# Altium PCB Cube_Sensor.PcbDoc
Units mm, origin at the board's own origin, x right, y up, seen from the top; angles counter-clockwise.
Board outline 21.88 x 22 mm, 2 copper layers (Top Layer, Bottom Layer), stack 1.071 mm thick; 17 components, 11 nets, 35 pads, 107 vias.
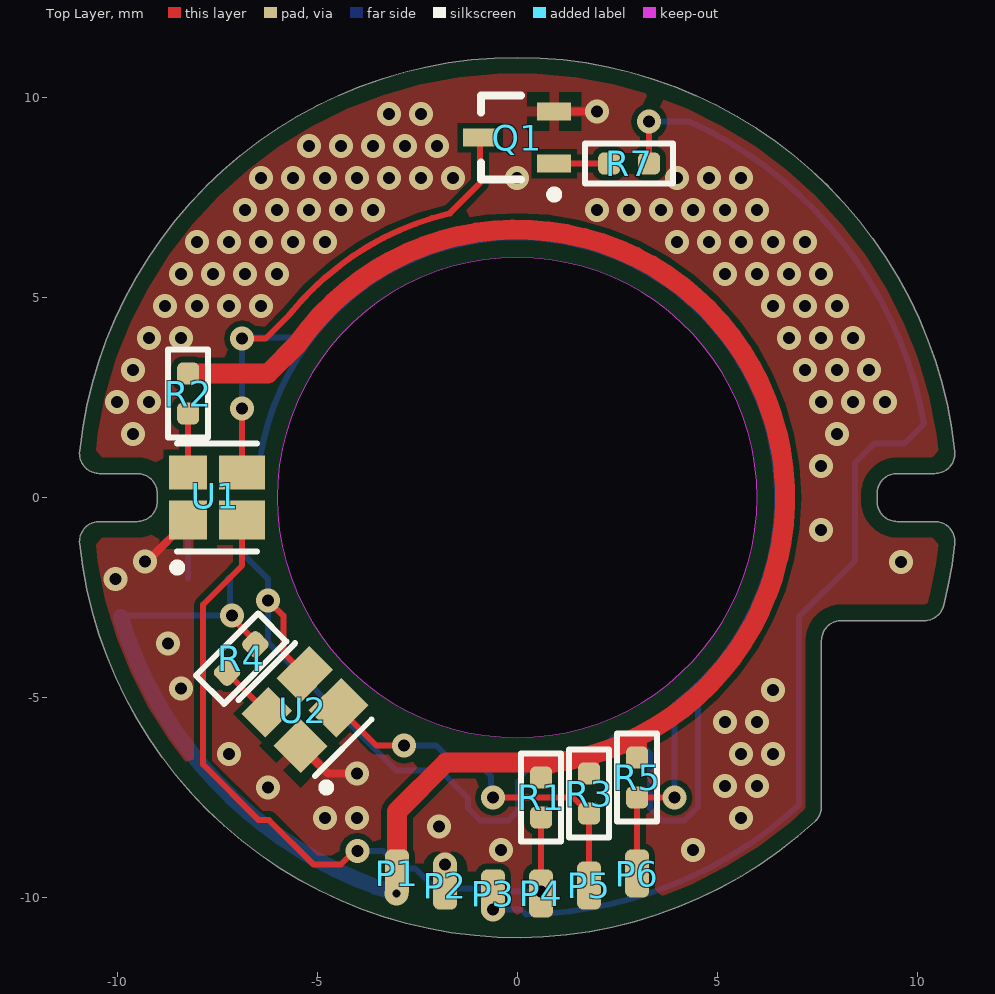
[diagram p0: Top Layer view]
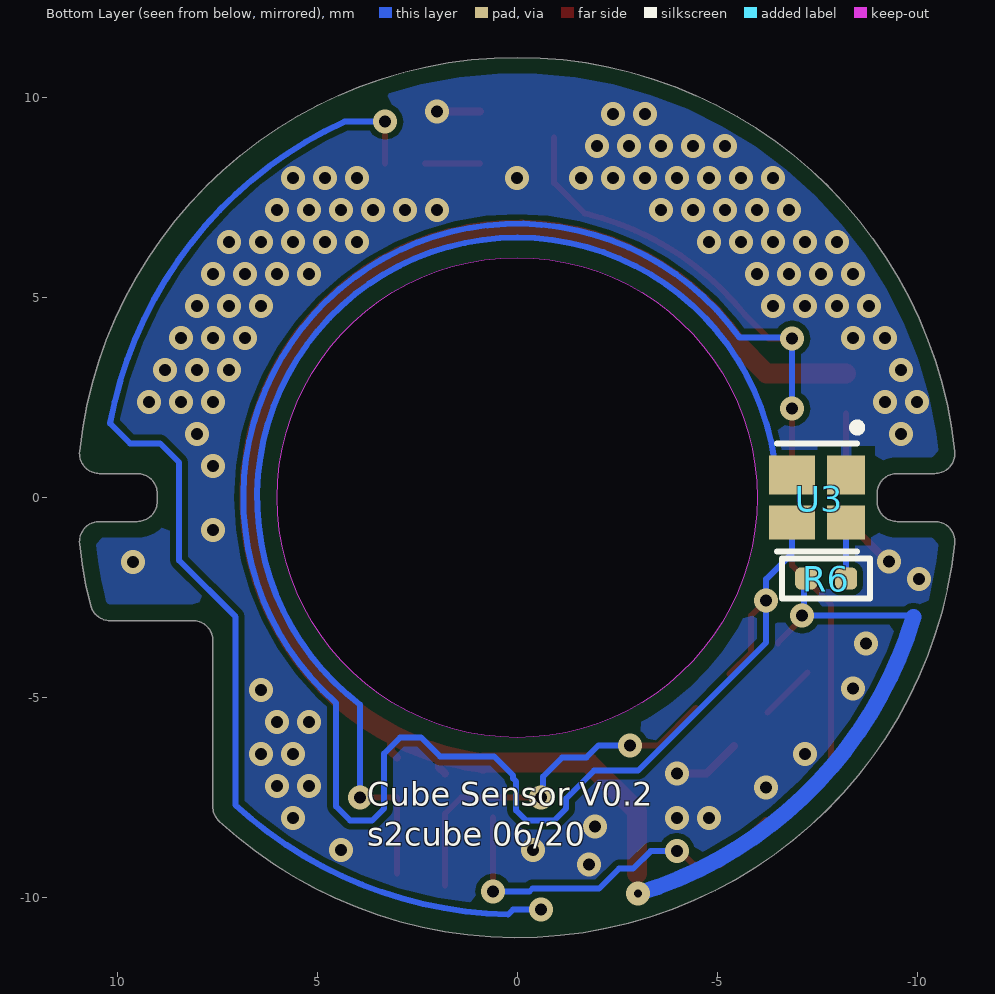
[diagram p1: Bottom Layer view, seen from below]
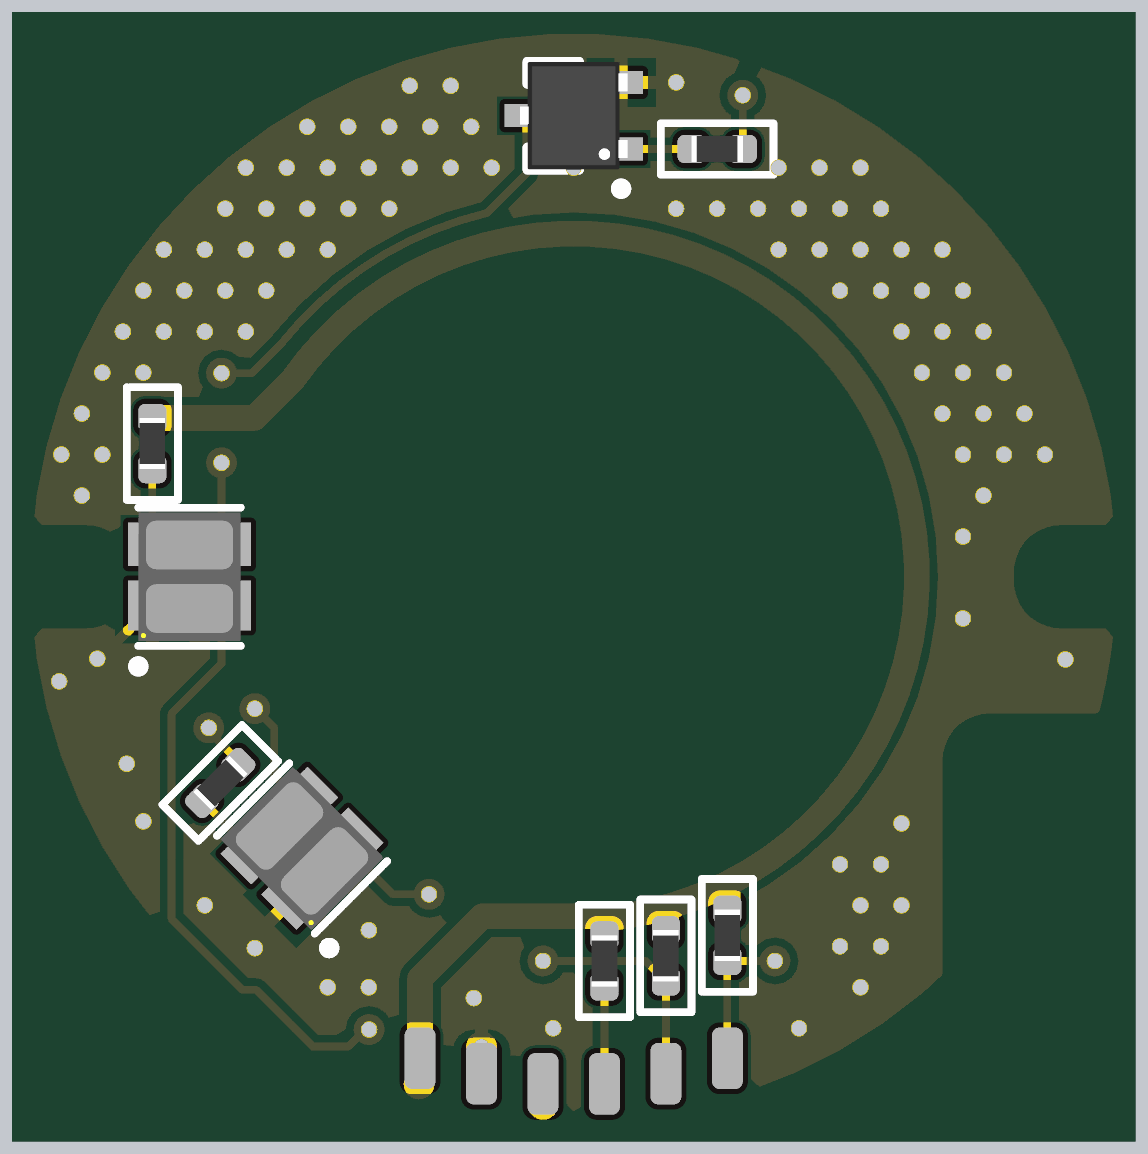
[diagram p2: 3D render of the assembled board from above, using the file's embedded part models]

## Layer stack, top to bottom
Top Solder: solder mask 0.0102, Solder Resist, Dk 3.5
Top Layer: signal copper 0.0356
Dielectric 1: dielectric 1, FR-4, Dk 4.8
Bottom Layer: signal copper 0.0356
Bottom Solder: solder mask 0.0102, Solder Resist, Dk 3.5

## Board outline
-10.939,-1.152 cw(c-10.442,-1.1) -10.442,-0.6 -9.5,-0.6 ccw(c-9.5,-0.1) -9,-0.1 -9,0.1 ccw(c-9.5,0.1) -9.5,0.6 -10.442,0.6 cw(c-10.442,1.1) -10.939,1.152 cw(c0,0) 10.939,1.152 cw(c10.442,1.1) 10.442,0.6 9.5,0.6 ccw(c9.5,0.1) 9,0.1 9,-0.1 ccw(c9.5,-0.1) 9.5,-0.6 10.442,-0.6 cw(c10.442,-1.1) 10.939,-1.152 cw(c0,0) 10.663,-2.7 cw(c10.179,-2.577) 10.179,-3.077 8.108,-3.077 ccw(c8.108,-3.577) 7.608,-3.577 7.608,-7.728 cw(c7.108,-7.728) 7.446,-8.096 cw(c0,0)
cut-out: -6,0 ccw(c0,0) 0,-6 ccw(c0,0) 6,0 ccw(c0,0) 0,6 ccw(c0,0)

## Design rules (kind name [scope] priority, off if disabled: settings)
BoardOutlineClearance [All] p1: gap=0.4 ignorepadtopadclearanceinfootprint=FALSE
Clearance [All] p1: gap=0.15 ignorepadtopadclearanceinfootprint=FALSE
PolygonConnect [All] p1: connectstyle=Relief reliefconductorwidth=0.254 reliefentries=4 polygonreliefangle="90 Angle" airgapwidth=0.254
RoutingVias [All] p1: holewidth=0.3 width=0.6 viastyle="Through Hole" minholewidth=0.3 minwidth=0.55 maxholewidth=1 maxwidth=6
SolderMaskExpansion [All] p1: expansion=0.102 istentingtop=FALSE
Width [All] p1: maxlimit=10 minlimit=0.15 preferedwidth=0.15
30 further rules are at their usual default settings.

## Components (designator, comment, footprint, x,y, rotation, side; value= is the part's Value field where it differs from the comment)
P1 "PAD_4" PAD_B2B -3,-9.4 r90 top
P2 "PAD_4" PAD_B2B -1.8,-9.7 r270 top
P3 "PAD_4" PAD_B2B -0.6,-9.9 r90 top
P4 "PAD_4" PAD_B2B 0.6,-9.9 r90 top
P5 "PAD_4" PAD_B2B 1.8,-9.7 r90 top
P6 "PAD_4" PAD_B2B 3,-9.4 r90 top
Q1 "SSM3K36TU" SSM3K36TU 0,9 r180 top
R1 "330R" RESC0402X04N 0.6,-7.5 r90 top
R2 "330R" RESC0402X04N -8.225,2.6 r90 top
R3 "330R" RESC0402X04N 1.8,-7.4 r90 top
R4 "330R" RESC0402X04N -6.9,-4.025 r45 top
R5 "330R" RESC0402X04N 3,-7 r90 top
R6 "330R" RESC0402X04N -7.725,-2.025 r0 bottom
R7 "330R" RESC0402X04N 2.8,8.35 r0 top
U1 "VCNT2020" VCNT2020 -7.5,0 r90 top locked
U2 "VCNT2020" VCNT2020 -5.303,-5.303 r135 top locked
U3 "VCNT2020" VCNT2020 -7.5,0 r270 bottom locked

## Footprints (in the part's own frame and the unit in brackets; to place one, negate y for a bottom-side part, rotate by r counter-clockwise, add the part's x,y. Pads: shape width x height; smd on the part's side, far side on the other; paste and mask are expansions set on the pad)
PAD_B2B [mm]
  rrect50% 1.2x0.6 smd: 1(0,0)
RESC0402X04N [mm] "Chip Resistor, 2-Leads, Body 1.00x0.50mm, IPC Medium Density"
  rrect50% 0.55x0.55 smd: 1(-0.5,0) 2(0.5,0)
  silkscreen extent -1.1,-0.5 1.1,0.5, body extent -0.5,-0.25 0.5,0.25, height 0.35
SSM3K36TU [mm] "SOTFL, 3-Leads, Body 2.00x2.10mm, Pitch 0.65mm, IPC Medium Density"
  rect 0.85x0.45 smd: 1(-0.925,0.65) 2(-0.925,-0.65) 3(0.925,0)
  silkscreen extent -1.02,-1.05 0.9,1.52, body extent -1.05,-1.05 1.05,1.05, height 0.75
VCNT2020 [mm] "4-SMD"
  rect 0.97x0.95 smd: 1(-0.56,0.725)
  rect 0.97x1.15 smd: 2(-0.56,-0.625)
  rect 0.85x0.95 smd: 3(0.63,0.725)
  rect 0.85x1.15 smd: 4(0.63,-0.625)
  silkscreen extent -1.85,-1 1.35,1.1, body extent -1.25,-1 1.25,1, height 0.81

## Part data
P1 P2 P3 P4 P5 P6: "a Pad for board to board connection"
Q1: "N-Channel 20V 500mA (Ta) 800mW (Ta) Surface Mount UFM", Case=UFM, Manufacturer="Toshiba Semiconductor and Storage", Supplier Part Number 1=Digi-Key, Categories=Transistors, Manufacturer Part Number=SSM3K36TU, Supplier 1=SSM3K36TULFCT-ND
R1 R2 R3 R4 R5 R6 R7: library part "RES 330R", "RES SMD 330R OHM 1% 1/16W 0402", Manufacturer=YAGEO, Manufacturer Part Number=RC0402FR-07330RL, Package / Case=0402, Supplier Part Number 1=C105875, Category=Resistors, Resistance=330R, Supplier 1=LCSC
U1 U2 U3: "REFLECTIVE SENSOR WITH PTR OUTPU", Case="4-SMD Module", Manufacturer="Vishay Semiconductor Opto Division", Supplier Part Number 1=VCNT2020CT-ND, Categories="Optical Sensors", Manufacturer Part Number=VCNT2020, Supplier 1=Digi-Key

## Via types
v1: diameter 0.6, hole 0.3, Top Layer to Bottom Layer, tented both sides, 106 vias
v2: diameter 0.6, hole 0.2, Top Layer to Bottom Layer, tented both sides, 1 vias

## Nets (pads, with @x,y where several pads share a name; then routed paths per layer and width w, separated by ;. In a path a pad name is that pad's centre, name@x,y a point inside that pad or via, vN(x,y) a via of type N, cw(c..) or ccw(c..) an arc to the next point about the centre after c; other vN are vias at no path point)
CTRL: P3.1 R7.2 | length 31.7
  Top Layer w0.15: R7.2 v1(3.3,9.399)
  Bottom Layer w0.15: v1(-0.6,-10.3) 0.101,-10.3 0.226,-10.424 ccw(c0,0) 7.04,-7.691 7.04,-2.985 8.45,-1.575 8.45,0.875 8.925,1.35 9.675,1.35 10.175,1.85 ccw(c0,0) 4.313,9.399 v1(3.3,9.399)
GND: P2.1 Q1.2 U1.1 U2.1 U3.1 | length 4.3
  Top Layer w0.2: v1(-9.3,-1.6) -9.255,-1.6 -8.225,-0.57 U1.1 ; U2.1 -4.732,-6.9 v1(-4,-6.9) ; Q1.2 v1(2,9.65)
  other v1: -1.8,-9.175 -0.401,-8.815 4.399,-8.815 -1.95,-8.225 -4.801,-8.015 -4.001,-8.015 5.599,-8.015 -6.225,-7.25 5.199,-7.215 5.999,-7.215 -7.201,-6.415 5.599,-6.415 6.399,-6.415 5.199,-5.615 5.999,-5.615 6.399,-4.815 -8.4,-4.775 -8.725,-3.65 -10.045,-2.042 9.599,-1.615 7.599,-0.815 7.599,0.785 -9.601,1.585 7.999,1.585 -10.001,2.385 -9.201,2.385 7.599,2.385 8.399,2.385 9.199,2.385 -9.601,3.185 7.199,3.185 7.999,3.185 8.799,3.185 -9.201,3.985 -8.401,3.985 6.799,3.985 7.599,3.985 8.399,3.985 -8.801,4.785 -8.001,4.785 -7.201,4.785 -6.401,4.785 6.399,4.785 7.199,4.785 7.999,4.785 -8.401,5.585 -7.601,5.585 -6.801,5.585 -6.001,5.585 5.199,5.585 5.999,5.585 6.799,5.585 7.599,5.585 -8.001,6.385 -7.201,6.385 -6.401,6.385 -5.601,6.385 -4.801,6.385 3.999,6.385 4.799,6.385 5.599,6.385 6.399,6.385 7.199,6.385 -6.801,7.185 -6.001,7.185 -5.201,7.185 -4.401,7.185 -3.601,7.185 1.999,7.185 2.799,7.185 3.599,7.185 4.399,7.185 5.199,7.185 5.999,7.185 -6.401,7.985 -5.601,7.985 -4.801,7.985 -4.001,7.985 -3.201,7.985 -2.401,7.985 -1.601,7.985 -0.001,7.985 3.999,7.985 4.799,7.985 5.599,7.985 -5.201,8.785 -4.401,8.785 -3.601,8.785 -2.801,8.785 -2.001,8.785 -3.201,9.585 -2.401,9.585
IRED1: R2.1 U1.3 | length 1.5
  Top Layer w0.15: U1.3 R2.1
IRED2: R4.1 U2.3 | length 1.4
  Top Layer w0.15: R4.1 U2.3
IRED3: R6.1 U3.3 | length 1.4
  Bottom Layer w0.15: R6.1 U3.3
IRED_GND: Q1.3 U1.4 U2.4 U3.4 | length 60.1
  Top Layer w0.15: U1.4 v1(-6.875,2.225) ; v1(-6.875,3.975) -6.288,3.975 -5.69,4.573 cw(c0,0) -1.706,7.098 ; v1(-6.225,-2.575) -5.847,-2.953 -5.847,-3.876 U2.4 ; -1.684,7.106 -0.925,7.865 Q1.3
  Bottom Layer w0.15: U3.4 -6.875,-1.392 -6.225,-2.042 v1(-6.225,-2.575) -6.225,-3.625 -3.025,-6.825 -1.925,-6.825 -1.225,-7.525 -1.225,-7.775 -0.925,-8.075 -0.225,-8.075 0.025,-7.825 0.025,-7.1 0.1,-7.025 0.1,-6.95 0.575,-6.475 1.925,-6.475 2.4,-6 2.925,-6 3.325,-6.4 3.325,-7.775 3.625,-8.075 4.175,-8.075 4.525,-7.725 4.525,-5.139 4.533,-5.131 ccw(c0,0) -5.559,3.996 -6.854,3.996 v1(-6.875,3.975) v1(-6.875,2.225)
MAIN_CTRL_G: Q1.1 R7.1 | length 1.4
  Top Layer w0.15: Q1.1 R7.1
S1: P4.1 R1.1 U1.2 | length 18.5
  Top Layer w0.15: U1.2 -6.875,-1.7 -7.175,-2 -7.85,-2.675 -7.85,-6.675 -6.461,-8.064 -6.203,-8.064 -5.096,-9.171 -4.405,-9.171 -4.073,-8.839 v1(-3.995,-8.839) ; P4.1 v1(0.6,-9.85) R1.1
  Bottom Layer w0.15: v1(-3.995,-8.839) -3.336,-8.839 -2.9,-9.275 -2.55,-9.275 -2.05,-9.775 -0.383,-9.775 -0.308,-9.85 v1(0.6,-9.85)
S2: P5.1 R3.1 U2.2 | length 9.4
  Top Layer w0.15: U2.2 -3.523,-6.2 v1(-2.825,-6.2) ; v1(-0.6,-7.5) 1.4,-7.5 R3.1 P5.1
  Bottom Layer w0.15: v1(-2.825,-6.2) -2.027,-6.2 -1.727,-6.5 -1.125,-6.5 -0.65,-6.975 -0.65,-7.45 v1(-0.6,-7.5)
S3: P6.1 R5.1 U3.2 | length 31
  Top Layer w0.15: P6.1 R5.1 v1(3.928,-7.5)
  Bottom Layer w0.15: U3.2@-6.475,0.564 cw(c0,0) 3.928,-5.179 v1(3.928,-7.5)
VDD_3V3: P1.1 R1.2 R2.2 R3.2 R4.2 R5.2 R6.2 | length 51.6
  Top Layer w0.15: v1(-7.125,-2.95) -7.125,-3.021 -6.525,-3.621 R4.2@-6.525,-3.65
  Top Layer w0.2: R3.2 1.952,-6.748 1.952,-6.448 2,-6.4 ; R5.2 3.152,-6.348 3.152,-6.048 3.2,-6
  Top Layer w0.5: R2.2 -6.231,3.1 -5.488,3.843 cw(c0,0) 0.85,-6.646 ; P1.1 -3,-7.846 -1.779,-6.625 0.837,-6.625
  Bottom Layer w0.15: -9.9,-2.95 v1(-7.125,-2.95) -7.175,-2.9 -7.175,-2.075 R6.2
  Bottom Layer w0.4: -9.909,-2.99 ccw(c0,0) v2(-3.019,-9.9)

## Polygon pours and split planes (outlines as drawn)
GND on Bottom Layer "GND_L02_P000" (solid, pour order 0): -12.438,13.213 13.562,13.213 13.562,-12.787 -12.438,-12.787
GND on Top Layer "GND_L01_P001" (solid, remove dead copper, pour order 1): -13.737,12.67 12.263,12.67 12.263,-13.33 -13.737,-13.33

## Silkscreen, mask and mechanical layers (free items; w line width, h text height)
Bottom Overlay:
  text "Cube Sensor V0.2 / s2cube 06/20" at 3.75,-8.9 h1
Mechanical 1:
  circle w0.8: c0,0 r6
  lines w0.8: -10.939,-1.152 ccw(c0,0) 7.446,-8.096 ccw(c7.108,-7.728) 7.608,-7.728 7.608,-3.577 cw(c8.108,-3.577) 8.108,-3.077 10.179,-3.077 ccw(c10.179,-2.577) 10.663,-2.7 ccw(c0,0) 10.939,-1.152 ccw(c10.442,-1.1) 10.442,-0.6 9.5,-0.6 cw(c9.5,-0.1) 9,-0.1 9,0.1 cw(c9.5,0.1) 9.5,0.6 10.442,0.6 ccw(c10.442,1.1) 10.939,1.152 ccw(c0,0) -10.939,1.152 ccw(c-10.442,1.1) -10.442,0.6 -9.5,0.6 cw(c-9.5,0.1) -9,0.1 -9,-0.1 cw(c-9.5,-0.1) -9.5,-0.6 -10.442,-0.6 ccw(c-10.442,-1.1) -10.939,-1.152